# Altium PCB sequencer pvb v2.PcbDoc
Units mil, origin at the board's own origin, x right, y up, seen from the top; angles counter-clockwise.
Board outline 2440 x 3170 mil, 2 copper layers (Top Layer, Bottom Layer); 35 components, 24 nets, 114 pads, 2 vias.
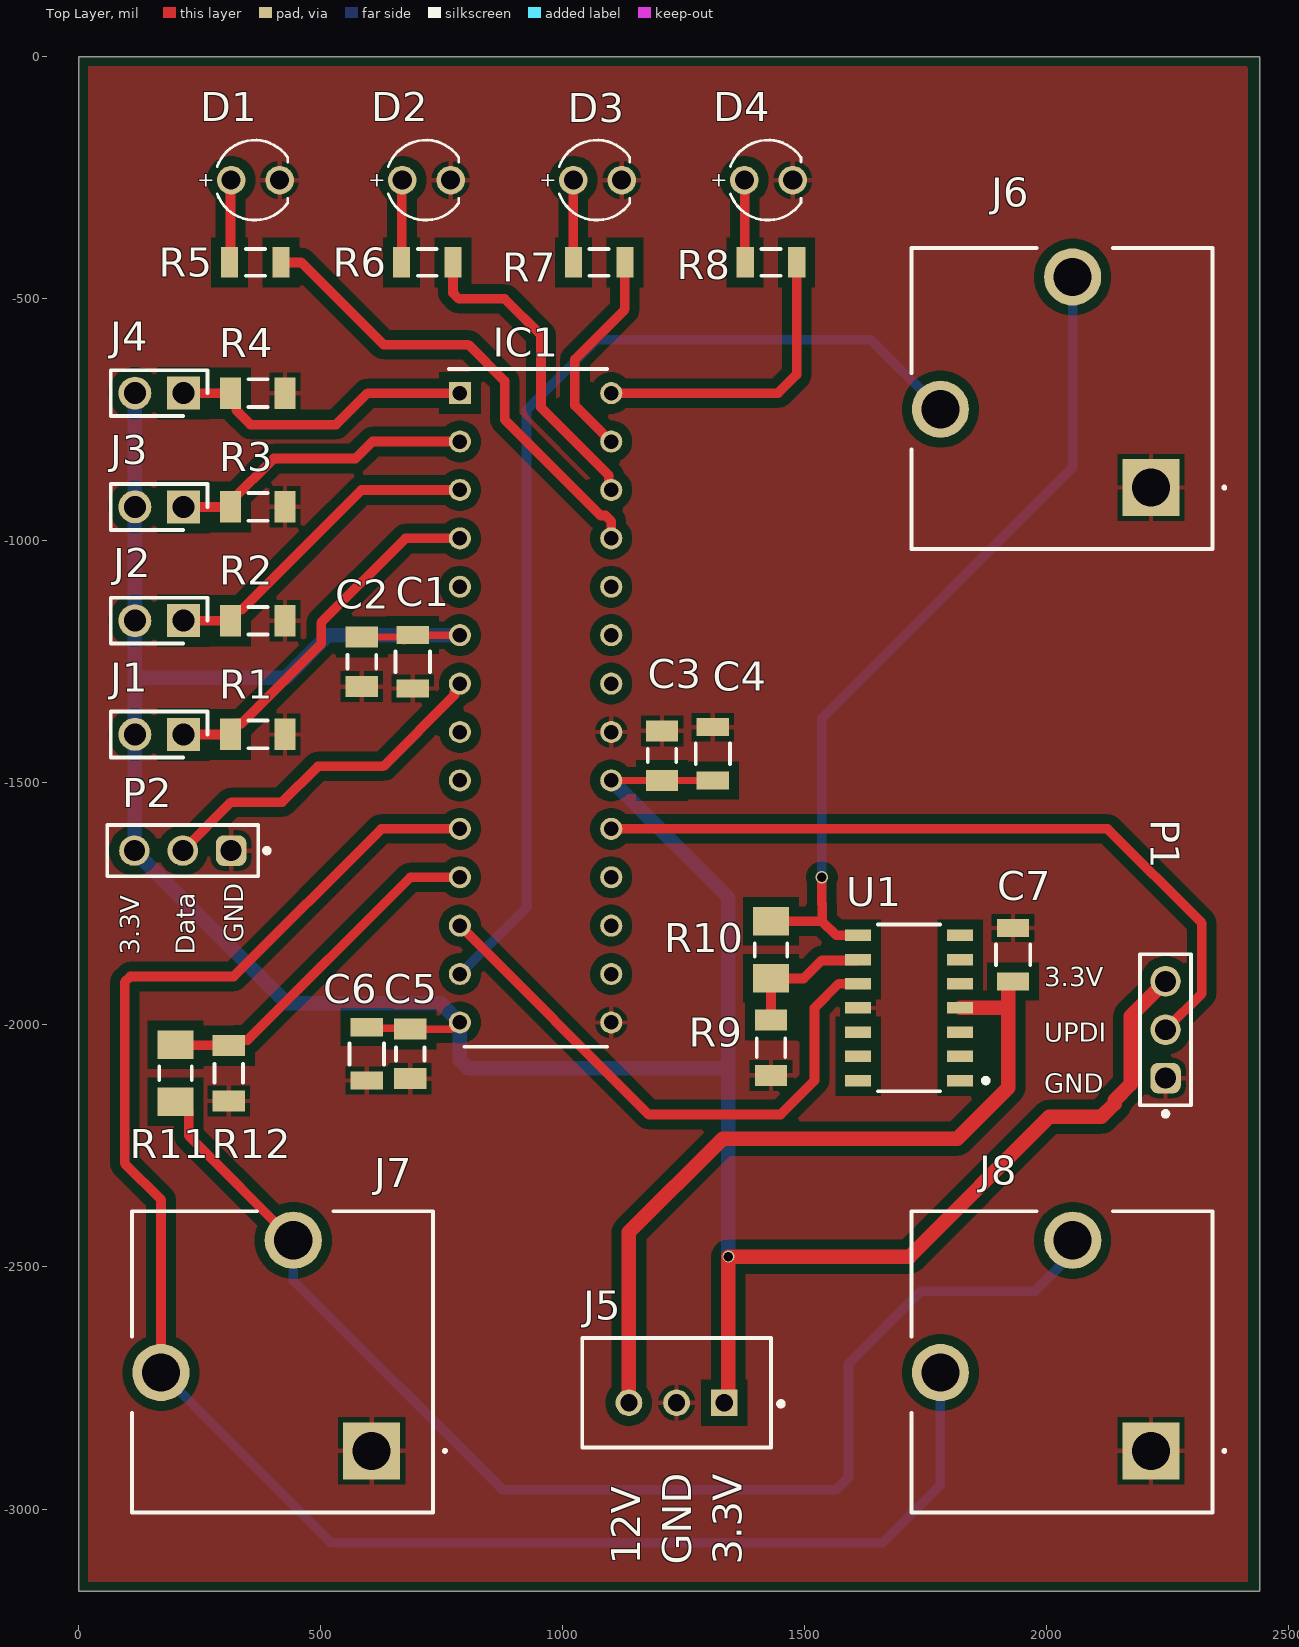
[diagram p0: Top Layer view]
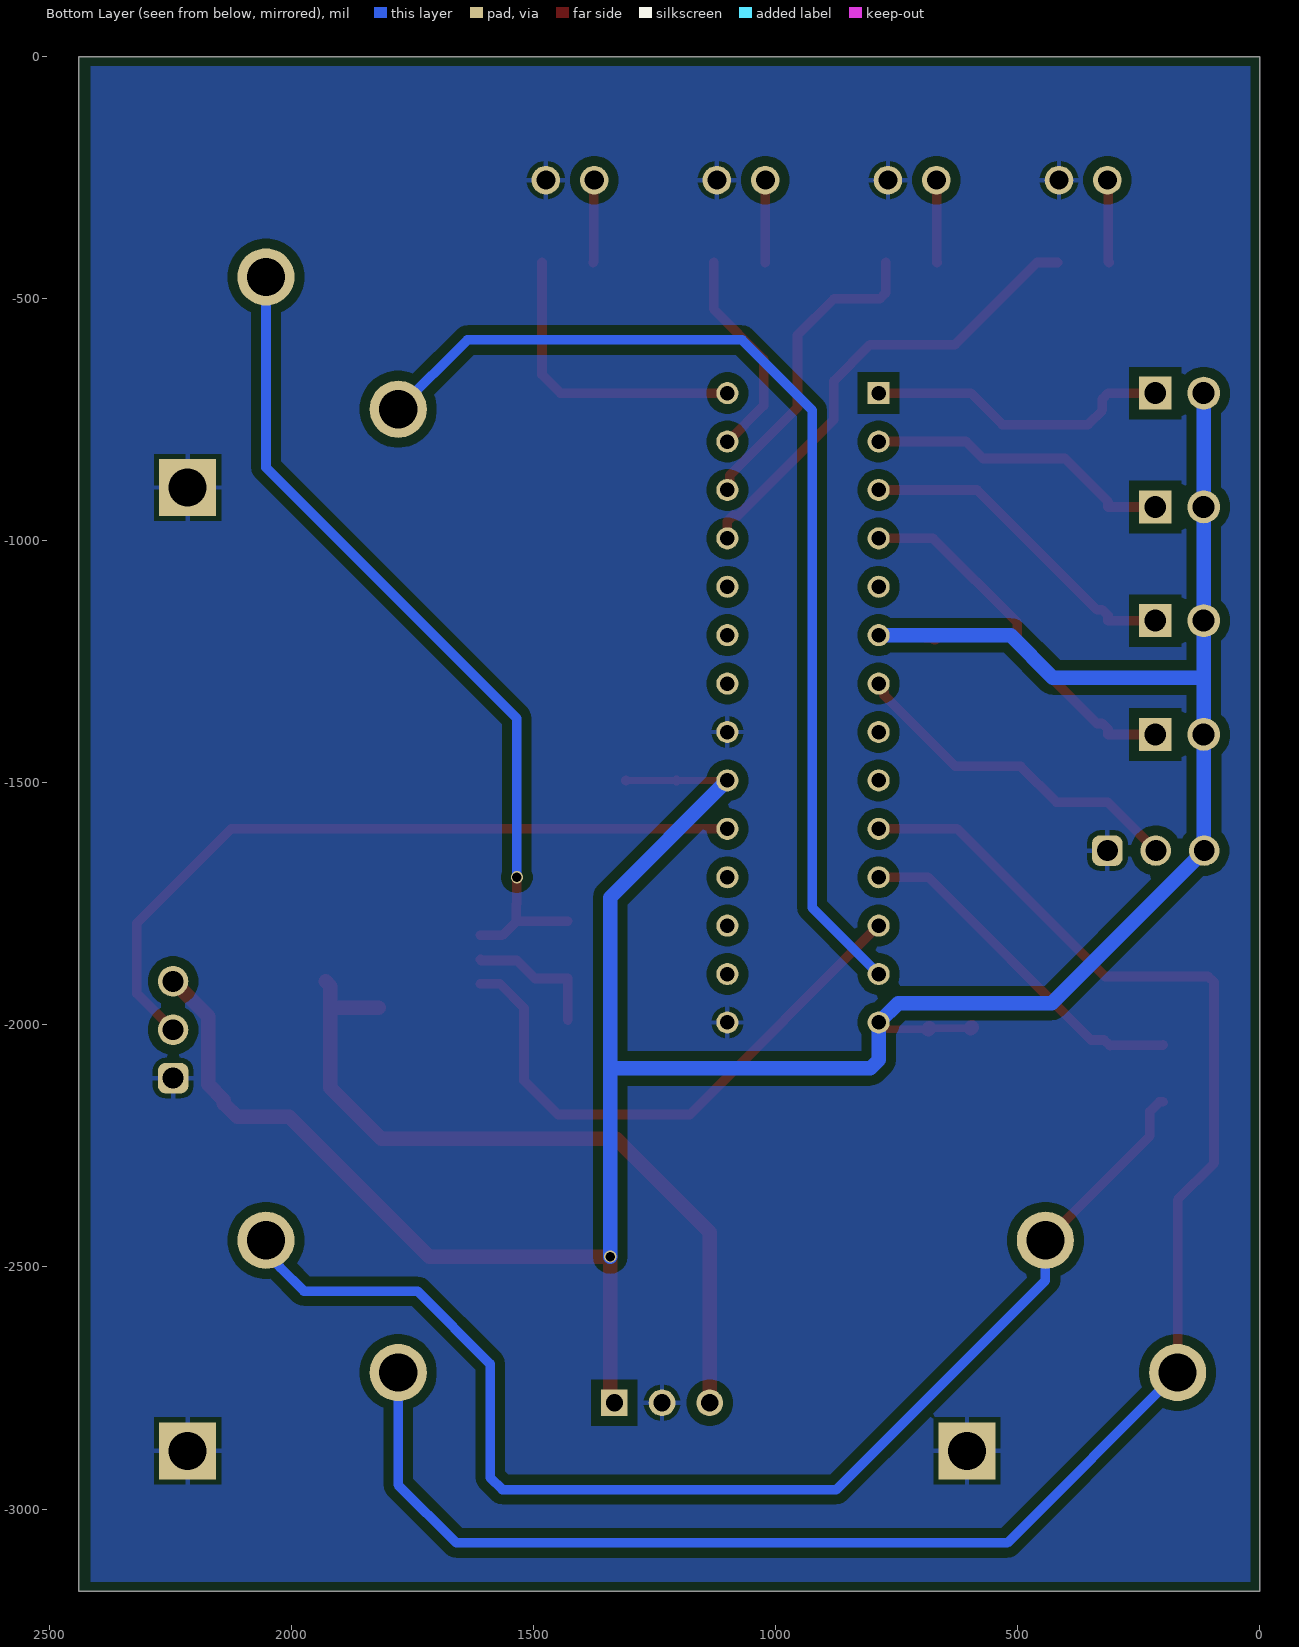
[diagram p1: Bottom Layer view, seen from below]

## Layer stack, top to bottom
Top Solder: solder mask 0.4, Solder Resist, Dk 3.5
Top Layer: signal copper 1.4
Dielectric 1: dielectric 12.6, FR-4, Dk 4.8
Bottom Layer: signal copper 1.4
Bottom Solder: solder mask 0.4, Solder Resist, Dk 3.5

## Board outline
0,-3170 0,0 2440,0 2440,-3170

## Design rules (kind name [scope] priority, off if disabled: settings)
Clearance [All] p1: gap=10 ignorepadtopadclearanceinfootprint=TRUE except(20: Arc-Fill Arc-Poly Arc-Region Track-Fill Track-Poly Track-Region SMDPad-Fill SMDPad-Poly SMDPad-Region THPad-Fill THPad-Poly THPad-Region Via-Fill Via-Poly Via-Region Fill-Fill Fill-Poly Fill-Region Poly-Poly Poly-Region Region-Region)
Height [All] p1: minheight=0 maxheight=99999 prefheight=500
HoleSize [All] p1: absolutevalues=TRUE maxlimit=220.47 minlimit=19.68 maxpercent=80.000 minpercent=20.000
HoleToHoleClearance [All] p1: gap=15 allowstackedmicrovias=TRUE
PolygonConnect [All] p1: connectstyle=Relief reliefconductorwidth=10 reliefentries=4 polygonreliefangle="90 Angle" airgapwidth=10
RoutingVias [All] p1: holewidth=15 width=18 viastyle="Through Hole" minholewidth=12 minwidth=12 maxholewidth=18 maxwidth=25
SilkToSilkClearance [All] p1: silktosilkclearance=15
SilkToSolderMaskClearance [IsPad] p1: minsilkscreentomaskgap=5 clearancetoexposedcopper=TRUE
SolderMaskExpansion [All] p1: expansion=4 istentingtop=FALSE
SupplyNets "Schematic Supply Nets_2" [InNet('+12')] p1: voltage=0.000
SupplyNets "Schematic Supply Nets_1" [InNet('+3.3')] p2: voltage=0.000
SupplyNets "Schematic Supply Nets" [InNet('GND')] p3: voltage=0.000
UnRoutedNet [All] p1: checkbadconnections=TRUE
Width [All] p1: maxlimit=100 minlimit=8 preferedwidth=20 minimp=50.000000 maximp=50.000000 favimp=50.000000
24 further rules are at their usual default settings.

## Components (designator, comment, footprint, x,y, rotation, side; value= is the part's Value field where it differs from the comment)
C1 "C1206C104K2RACTU" FP-C1206C-EB-MFG 690,-1250 r270 top value="0.10 μF"
C2 "C1206C105K5RACTU" CAPC3216X110X50LL20T25 585,-1250 r90 top
C3 "C1206C105K5RACTU" CAPC3216X110X50LL20T25 1205,-1443.82 r270 top
C4 "C1206C104K2RACTU" FP-C1206C-EB-MFG 1310,-1440 r90 top value="0.10 μF"
C5 "C1206C105K5RACTU" CAPC3216X110X50LL20T25 685,-2060 r90 top
C6 "C1206C104K2RACTU" FP-C1206C-EB-MFG 595,-2059.88 r270 top value="0.10 μF"
C7 "C1206C104K2RACTU" FP-C1206C-EB-MFG 1930,-1855 r270 top value="0.10 μF"
D1 "151031SS04000" WL-TMRC_D3.95H5.3 50365,49745 r0 top
D2 "151031SS04000" WL-TMRC_D3.95H5.3 50718.33,49745 r0 top
D3 "151031SS04000" WL-TMRC_D3.95H5.3 51071.67,49745 r0 top
D4 "151031SS04000" WL-TMRC_D3.95H5.3 51425,49745 r0 top
IC1 "AVR128DB28-I_SP" DIP794W56P254L3486H508Q28N 943.74,-1345 r0 top
J1 "78229-102HLF" HDRV2W67P0X254_1X2_508X241X1082P 216.1,-1400 r180 top
J2 "78229-102HLF" HDRV2W67P0X254_1X2_508X241X1082P 216.1,-1165 r180 top
J3 "78229-102HLF" HDRV2W67P0X254_1X2_508X241X1082P 216.1,-930 r180 top
J4 "78229-102HLF" HDRV2W67P0X254_1X2_508X241X1082P 216.1,-695 r180 top
J5 "B3B-XH-A(LF)(SN)" FP-B3B-XH-A_LF_SN-MFG 1235,-2760 r180 top
J6 "ACJS-NV35-3" ACJSNV353 2215,-890 r0 top
J7 "ACJS-NV35-3" ACJSNV353 605,-2880 r0 top
J8 "ACJS-NV35-3" ACJSNV353 2215.04,-2880 r0 top
P1 "61300311121" 61300311121 2245,-2010 r90 top
P2 "61300311121" 61300311121 215,-1640 r180 top
R1 "100" RESC3216X70X50NL05T20 370,-1400 r0 top
R2 "100" RESC3216X70X50NL05T20 370,-1165 r0 top
R3 "100" RESC3216X70X50NL05T20 370,-930 r0 top
R4 "100" RESC3216X70X50NL05T20 370,-695 r0 top
R5 "68" RESC3216X60X45LL10T20 365,-425 r0 top
R6 "68" RESC3216X60X45LL10T20 720,-425 r0 top
R7 "68" RESC3216X60X45LL10T20 1075,-425 r0 top
R8 "68" RESC3216X60X45LL10T20 1430,-425 r0 top
R9 "8.2k" RESC3216X60X45NL10T20 1430,-2047.09 r90 top
R10 "3.9k" RESC3216X70X50ML20T25 1430,-1845 r90 top
R11 "3.9k" RESC3216X70X50ML20T25 200,-2100 r90 top
R12 "8.2k" RESC3216X60X45NL10T20 310,-2100 r270 top
U1 "LM324DT" FP-SO-14-MFG 1715.32,-1965 r180 top

## Footprints (in the part's own frame and the unit in brackets; to place one, negate y for a bottom-side part, rotate by r counter-clockwise, add the part's x,y. Pads: shape width x height; smd on the part's side, far side on the other; paste and mask are expansions set on the pad)
61300311121 [mm] "Pin Header, pitch 2.54 mm, THT, Vertical, single row, 3p"
  rrect50% 1.6x1.6 hole 1.1: 1(-2.54,0)
  round 1.6 hole 1.1: 2(0,0) 3(2.54,0)
  silkscreen extent -4.53,-1.35 3.96,1.35, body extent -3.81,-1.27 3.81,1.27, height 8.57
ACJSNV353 [mm]
  rect 3x3 hole 2: 1(0,0)
  round 3 hole 2: 3(-11.05,4.11) 4(-4.11,11.05)
  silkscreen extent -12.57,-3.23 3.9,12.57, body extent -12.57,-3.23 3.23,12.57, height 27.1
CAPC3216X110X50LL20T25 [mm] "Chip Capacitor, 2-Leads, Body 3.20x1.60mm, IPC High Density"
  rect 1.1x1.7 smd: 1(-1.3,0) 2(1.3,0)
  silkscreen extent -0.35,-0.75 0.35,0.75, body extent -1.7,-0.9 1.7,0.9, height 1.1
DIP794W56P254L3486H508Q28N [mil]
  rect 45.63x45.63 hole 29.88: 1(-156.26,650)
  round 45.63 hole 29.88: 2(-156.26,550) 3(-156.26,450) 4(-156.26,350) 5(-156.26,250) 6(-156.26,150) 7(-156.26,50) 8(-156.26,-50) 9(-156.26,-150) 10(-156.26,-250) 11(-156.26,-350) 12(-156.26,-450) 13(-156.26,-550) 14(-156.26,-650) 15(156.26,-650) 16(156.26,-550) 17(156.26,-450) 18(156.26,-350) 19(156.26,-250) 20(156.26,-150) 21(156.26,-50) 22(156.26,50) 23(156.26,150) 24(156.26,250) 25(156.26,350) 26(156.26,450) 27(156.26,550) 28(156.26,650)
  silkscreen extent -179,-700 147,700, body extent -162,-686 162,686, height 200
FP-B3B-XH-A_LF_SN-MFG [mm]
  rect 1.4x1.4 hole 0.9 paste-2539.97 mask+0: 1(-2.5,0.525)
  round 1.4 hole 0.9 paste-2539.97 mask+0: 2(0,0.525) 3(2.5,0.525)
  silkscreen extent -5.6,-2.88 4.95,2.88, body extent -5.05,-2.98 5.05,2.98, height 0.25
FP-C1206C-EB-MFG [mm]
  rect 0.95x1.7 smd paste+0 mask+0: 1(-1.4,0) 2(1.4,0)
  silkscreen extent -0.55,-0.9 0.55,0.9, body extent -2,-1 2,1, height 0.25
FP-SO-14-MFG [mm]
  rect 1.35x0.6 smd paste+0 mask+0: 1(-2.675,3.81) 2(-2.675,2.54) 3(-2.675,1.27) 4(-2.675,0) 5(-2.675,-1.27) 6(-2.675,-2.54) 7(-2.675,-3.81) 8(2.675,-3.81) 9(2.675,-2.54) 10(2.675,-1.27) 11(2.675,0) 12(2.675,1.27) 13(2.675,2.54) 14(2.675,3.81)
  silkscreen extent -4.15,-4.38 1.63,4.38, body extent -3.45,-4.47 3.45,4.47, height 0.25
HDRV2W67P0X254_1X2_508X241X1082P [mm]
  rect 1.725x1.725 hole 1.15: 1(0,0)
  round 1.725 hole 1.15: 2(2.54,0)
  silkscreen extent -1.27,-1.2 3.81,1.2, body extent -1.27,-1.2 3.81,1.2, height 10.82
RESC3216X60X45LL10T20 [mm] "Chip Resistor, 2-Leads, Body 3.20x1.60mm, IPC High Density"
  rect 0.9x1.6 smd: 1(-1.35,0) 2(1.35,0)
  silkscreen extent -0.5,-0.7 0.5,0.7, body extent -1.65,-0.85 1.65,0.85, height 0.6
RESC3216X60X45NL10T20 [mm] "Chip Resistor, 2-Leads, Body 3.20x1.60mm, IPC Medium Density"
  rect 1.1x1.7 smd: 1(-1.45,0) 2(1.45,0)
  silkscreen extent -0.5,-0.75 0.5,0.75, body extent -1.65,-0.85 1.65,0.85, height 0.6
RESC3216X70X50ML20T25 [mm] "Chip Resistor, 2-Leads, Body 3.20x1.60mm, IPC Low Density"
  rect 1.5x1.9 smd: 1(-1.5,0) 2(1.5,0)
  silkscreen extent -0.35,-0.85 0.35,0.85, body extent -1.7,-0.9 1.7,0.9, height 0.7
RESC3216X70X50NL05T20 [mm] "Chip Resistor, 2-Leads, Body 3.20x1.60mm, IPC Medium Density"
  rect 1.1x1.65 smd: 1(-1.425,0) 2(1.425,0)
  silkscreen extent -0.5,-0.72 0.5,0.72, body extent -1.63,-0.82 1.62,0.82, height 0.7
WL-TMRC_D3.95H5.3 [mm] "THT Mono-color Round Color LED, 2-leads"
  round 1.5 hole 1: 1(-1271.27,-1270) 2(-1268.73,-1270)
  silkscreen extent -1272,-1272.1 -1268.31,-1267.9, body extent -1271.99,-1271.97 -1268.37,-1268.03, height 5.35

## Part data
C1 C4 C6 C7: library part CMP-1037-04222-2, "CAP CER 0.1UF 200V 10% X7R 1206", Capacitance="0.10 μF", Manufacturer=KEMET, Package=C1206C-EB, Temperature="-55°C to +150°C", Temperature Characteristic=X7R, Temperature Coefficient=15%, Temperature Range High=+150°C, Temperature Range Low=-55°C, Tolerance=0.1, Voltage Rating="200 V", Automotive=Yes, Automotive Grade="Grade 0", Category=Cap, ComponentLink2Description=Datasheet, ComponentLink2URL=https://content.kemet.com/datasheets/KEM_C1007_X8R_ULTRA_150C_SMD.pdf, Device Class L1="Passive Components", Device Class L2=Capacitors, Device Class L3="Ceramic Capacitors", Digikey Description="CAP CER 0.1UF 200V 10% X7R 1206", Height=0.88mm, Ipc Land Pattern Name=CAPC320160X78, Lead Free=Yes, Manufacturer Part Number=C1206C104K2RACTU, Material=Ceramic, Mouser Description="Multilayer Ceramic Capacitors MLCC - SMD/SMT 200volts 0.1uF X7R 10%", Octopart=https://octopart.com/c1206c104k2ractu-kemet-9138344, RoHS=TRUE
C2 C3 C5: library part CMP-2000-06011-1, "Chip Capacitor, 1 uF, +/- 10%, 50 V, -55 to 125 degC, 1206 (3216 Metric), RoHS, Tape and Reel", Capacitance=1uF, Capacitance - nF=1000nF, Case Code - in=1206, Case Code - mm=3216, Case Height=1mm, Case Length=3.2mm, Case Width=1.6mm, Dielectric=X7R, Manufacturer=Kemet, Maximum Operating Temperature=+125C, Minimum Operating Temperature=-55C, Operating Temperature Range=-55Cto+125C, Package / Case=1206(3216metric), Package Description="2-Pin Surface Mount Device, Body 3.2 x 1.6 mm", Temperature Coefficient / Code=+/-15%, Tolerance=10%, Voltage Rating=50V, Brand=Kemet, Class=Class1, Datasheet URL=http://www.kemet.com/docfinder?Partnumber=C1206C105K5RACTU, Datasheet Version=02/2016, Dimensions=1.6mmWx3.2mmLx1mmH, Factory Pack Quantity=2500, Manufacturer URL=http://www.kemet.com/, Mounting Technology=SurfaceMount, Package Reference=1206, Packaging=Reel, Product=GeneralTypeMLCCs, Product Category=MultilayerCeramicCapacitorsMLCC-SMD/SMT, RoHS=Details, Series=C1206C, Termination Style=SMD/SMT, Type=SMDMLCCX7R6.3-250VDCCommericalGrade, Voltage Rating DC=50V
D1 D2 D3 D4: library part CMP-1488-00005-2, Case/Package=Radial, Color=Red, Forward Current=100mA, Forward Voltage=2V, Max Operating Temperature=85°C, Max Reverse Voltage (DC)=5V, Min Operating Temperature=-40°C, Test Current=20mA, Dominant Wavelength=635nm, Height=5.3mm, Length=3mm, Lens Size=3mm, Lens Style="Circular, Diffused, Round", Luminous Intensity=160mcd, Mount="Through Hole", NexarPartId=29717802, Packaging=Bulk, Peak Wavelength=640nm, REACH SVHC=Unknown, RoHS=Compliant, Viewing Angle=40°, Wavelength=635nm, Width=3mm
IC1: "Integrated Circuit", Arrow Part Number=AVR128DB28-I/SP, Manufacturer_Name=Microchip, Mouser Part Number=579-AVR128DB28-I/SP, Arrow Price/Stock=https://www.arrow.com/en/products/avr128db28-isp/microchip-technology?region=nac, Datasheet Link=https://ww1.microchip.com/downloads/en/DeviceDoc/AVR128DB28-32-48-64-DataSheet-DS40002247A.pdf, Height=5.08mm, Manufacturer_Part_Number=AVR128DB28-I/SP, Mouser Price/Stock=https://www.mouser.co.uk/ProductDetail/Microchip-Technology/AVR128DB28-I-SP?qs=vmHwEFxEFR9SktvWL9jpqg%3D%3D
J1 J2 J3 J4: "Connector", Manufacturer_Name=Amphenol, Arrow Part Number=78229-102HLF, Arrow Price/Stock=https://www.arrow.com/en/products/78229-102hlf/amphenol-fci?region=europe, Datasheet Link=https://cdn.amphenol-icc.com/media/wysiwyg/files/drawing/69190.pdf, Height=10.82mm, Manufacturer_Part_Number=78229-102HLF
J5: library part CMP-17439-000014-3, "CONN HEADER VERT 3POS 2.5MM", Color=Natural, Contact Resistance=20mR, Current Rating=3A, Flammability Rating="UL94 V-0", Housing Color=White, Insulation Resistance=1GR, Max Operating Temperature=85°C, Max Voltage Rating (AC)=250V, Min Operating Temperature=-25°C, Connector Type=Header, Contact Finish - Mating=TIN, Contact Material=Brass, Contact Plating=Tin, Contact Shape=Square, Contact Type="Male Pin", Depth=5.75mm, Fastening Type=Detent, Gender=Male, Housing Material=Polyamide, Insulation Color=Natural, Insulation Material=Nylon, Lead Free="Lead Free", Lead Pitch=2.5mm, Length=9.9mm, Max Current Rating=3A, Max Voltage Rating (DC)=250V, Mount="Through Hole", Number of Contacts=3, Number of Positions=3, Number of Rows=1, Orientation=Straight, Packaging=Bulk, Pitch=2.5mm, REACH SVHC="No SVHC", Series=XH, Termination=Solder, Voltage Rating=250V, Voltage Rating (AC)=250V, Wire/Cable Gauge=22AWG
J6 J7 J8: "Connector", Manufacturer_Name=Amphenol, Mouser Part Number=523-ACJS-NV35-3, Arrow Part Number=ACJS-NV35-3, Arrow Price/Stock=https://www.arrow.com/en/products/acjs-nv35-3/amphenol-sine-systems, Datasheet Link=https://www.amphenolaudio.com/wp-content/uploads/2015/07/55010544000110_acjx-nv35-x.pdf, Height=27mm, Manufacturer_Part_Number=ACJS-NV35-3, Mouser Price/Stock=https://www.mouser.co.uk/ProductDetail/Amphenol-Audio/ACJS-NV35-3?qs=t8VhaDIDl4uNwZ56Tr4iPg%3D%3D
P1 P2: library part CMP-1502-01062-3, "Potmeter connectie", Color=Black, Contact Resistance=20mΩ, Current Rating=3A, Max Operating Temperature=105°C, Min Operating Temperature=-40°C, Operating Supply Voltage=250V, Connector Type="Male Pin", Contact Material=Copper, Contact Mating Length=5.9944mm, Contact Plating=Gold, Gender=Male, Height=8.94mm, Lead Free="Lead Free", Lead Pitch=2.54mm, Mount="Through Hole", NexarPartId=32855521, Number of Contacts=3, Number of Pins=3, Number of Positions=3, Number of Rows=1, Orientation=Vertical, Packaging=Bulk, Pitch=2.54mm, REACH SVHC=Unknown, RoHS=Compliant, Termination=Solder, Voltage Rating=250V
R1 R2 R3 R4: library part CMP-2003-00016-1, Manufacturer=Panasonic, Part Number=ERJ-8ENF1000V
R5 R6 R7 R8: library part CMP-1014-00378-2, Manufacturer="Vishay Dale", Part Number=CRCW120668R0FKEA
R9 R12: library part CMP-2003-02160-1, Manufacturer="Vishay Dale", Part Number=CRCW12063K90FKEA
R10 R11: library part CMP-2003-04435-1, Manufacturer=Panasonic, Part Number=ERA8AEB202V
U1: library part CMP-12131-000005-1, "IC OPAMP GP 4 CIRCUIT 14SO", Input Bias Current=0.02uA, Input Offset Voltage=2mV, Manufacturer=STMicroelectronics, Max Dual Supply Voltage=15V, Max Junction Temp=+150°C, Max Supply Voltage=30V, Min Dual Supply Voltage=1.5V, Min Supply Voltage=3V, Nominal Supply Current=0.7-1.5mA, Output Current Per Channel=20-50mA, Package=SO-14, Temperature="0°C to +70°C", Temperature Range High=+70°C, Temperature Range Low=0°C, Voltage Gain=100dB, Automotive=No, Bandwidth=1.3MHz, Category=IC, ComponentLink2Description=Datasheet, ComponentLink2URL=https://www.st.com/content/ccc/resource/technical/document/datasheet/bd/fc/46/43/26/8f/40/7f/CD00001046.pdf/files/CD00001046.pdf/jcr:content/translations/en.CD00001046.pdf, Device Class L1="Integrated Circuits (ICs)", Device Class L2="Linear ICs", Device Class L3="Amplifiers - Op Amps", Digikey Description="IC OPAMP GP 4 CIRCUIT 14SO", Footprint Url=https://www.st.com/content/ccc/resource/technical/document/datasheet/group3/10/8a/e6/12/f8/e8/49/ce/DM00366438/files/DM00366438.pdf/jcr:content/translations/en.DM00366438.pdf, Gain Bandwidth=1.3MHz, Height=1.75mm, Lead Free=Yes, Manufacturer Part Number=LM324DT, Mouser Description="LM324 Series 32 V 1.3 MHz Low Power Quad Operational Amplifier - SOIC-14", Number Of Channels=4, Octopart=https://octopart.com/lm324dt-stmicroelectronics-39579146, RoHS=TRUE, Standoff Height=0.1mm

## Via types
v1: diameter 25, hole 20, Top Layer to Bottom Layer, 2 vias

## Nets (pads, with @x,y where several pads share a name; then routed paths per layer and width w, separated by ;. In a path a pad name is that pad's centre, name@x,y a point inside that pad or via, vN(x,y) a via of type N, cw(c..) or ccw(c..) an arc to the next point about the centre after c; other vN are vias at no path point)
+3.3: C1.1 C2.2 C3.2 C4.1 C5.2 C6.1 IC1.6 IC1.14 IC1.20 J1.2 J2.2 J3.2 J4.2 J5.1 P1.3 P2.3 | length 6340.2
  Top Layer w15: C2.2 C1.1@671.3,-1198.82 ; C6.1@597.03,-2006.79 C5.2@682.97,-2006.79 ; C5.2 769.43,-2008.82 IC1.14@783.25,-1995 ; C1.1@690.06,-1194.94 IC1.6@787.42,-1194.94 ; IC1.20 C3.2 ; C3.2@1205.06,-1495.06 C4.1@1309.94,-1495.06
  Top Layer w20: C3.2 C3.2@1205.06,-1495.06 ; C4.1@1309.94,-1495.06 C4.1
  Top Layer w30: C6.1 C6.1@597.03,-2006.79 ; C1.1@671.3,-1198.82 675.24,-1194.88 C1.1 C1.1@690.06,-1194.94 ; C5.2@682.97,-2006.79 C5.2 ; IC1.14@783.25,-1995 IC1.14 ; IC1.6@787.42,-1194.94 IC1.6 ; J5.1 1341.9,-2772.2 v1(1341.9,-2478.79) 1716.21,-2478.79 2005,-2190 2112.38,-2190 2139.95,-2162.43 2139.95,-2155.36 2172.75,-2122.56 2172.75,-1982.25 P1.3
  Bottom Layer w30: J4.2 J3.2 J2.2 116.1,-1282.5 ; IC1.6 515,-1195 427.5,-1282.5 116.1,-1282.5 ; IC1.20 1341.9,-1736.9 1341.9,-2090 ; v1(1341.9,-2478.79) 1341.9,-2090 ; 116.1,-1282.5 J1.2 115.55,-1400.55 115.55,-1639.45 P2.3 430,-1955 747.48,-1955 IC1.14 787.48,-2072.43 805.05,-2090 1341.9,-2090
+12: C7.2 J5.3 U1.4 | length 1582.7
  Top Layer w30: J5.3 1136.57,-2428.43 1330,-2235 1815,-2235 1920,-2130 1920,-1965 ; U1.4 1920,-1965 ; C7.2 1920,-1920.12 1920,-1965
GND: C1.2 C2.1 C3.1 C4.2 C5.1 C6.2 C7.1 D1.2 D2.2 D3.2 D4.2 IC1.15 IC1.21 J5.2 J6.1 J7.1 J8.1 P1.1 P2.1 R1.2 R2.2 R3.2 R4.2 R9.1 R12.2 U1.11
NetD1_1: D1.1 R5.1 | length 171.3
  Top Layer w20: R5.1 313.43,-423.43 313.43,-256.57 D1.1
NetD2_1: D2.1 R6.1 | length 170.6
  Top Layer w20: R6.1 667.59,-424.26 667.59,-255.74 D2.1
NetD3_1: D3.1 R7.1 | length 170.1
  Top Layer w20: D3.1 1021.76,-255.09 1021.76,-424.91 R7.1
NetD4_1: D4.1 R8.1 | length 170.8
  Top Layer w20: D4.1 1375.93,-255.93 1375.93,-424.07 R8.1
NetIC1_1: IC1.1 J4.1 R4.1 | length 639.2
  Top Layer w20: J4.1 R4.1 325.55,-706.65 325.55,-730.55 355,-760 531.76,-760 596.76,-695 IC1.1
NetIC1_2: IC1.2 J3.1 R3.1 | length 633.6
  Top Layer w20: J3.1 R3.1 313.9,-919.17 403.07,-830 571.86,-830 606.86,-795 IC1.2
NetIC1_3: IC1.3 J2.1 R2.1 | length 689.6
  Top Layer w20: J2.1 R2.1 313.9,-1154.17 325.55,-1142.52 336.38,-1142.52 583.9,-895 IC1.3
NetIC1_4: IC1.4 J1.1 R1.1 | length 771.2
  Top Layer w20: J1.1 R1.1 313.9,-1389.17 325.55,-1377.52 336.38,-1377.52 500.94,-1212.95 500.94,-1169.06 675,-995 IC1.4
NetIC1_7: IC1.7 P2.2 | length 722.7
  Top Layer w20: P2.2 315,-1540 420,-1540 494.16,-1465.84 629.16,-1465.84 776.39,-1318.61 776.39,-1313.02 787.48,-1301.94 IC1.7
NetIC1_10: IC1.10 J7.3 J8.3 | length 3698.5
  Top Layer w20: J7.3 169.96,-2361.07 95,-2286.11 95,-1911.72 106.72,-1900 320,-1900 625,-1595 IC1.10
  Bottom Layer w20: J7.3 521.77,-3070 1660,-3070 1780,-2950 J8.3
NetIC1_11: IC1.11 R11.2 R12.1 | length 732.4
  Top Layer w20: R11.2 200.98,-2041.93 309.02,-2041.93 R12.1 321.65,-2031.26 348.74,-2031.26 685,-1695 IC1.11
NetIC1_12: IC1.12 U1.10 | length 1183.8
  Top Layer w20: IC1.12 1177.48,-2185 1450,-2185 1520,-2115 1520,-1965 1570,-1915 U1.10
NetIC1_13: IC1.13 J6.3 | length 2196.3
  Bottom Layer w20: IC1.13 925,-1757.48 925,-730 1070,-585 1636.77,-585 J6.3
NetIC1_19: IC1.19 P1.2 | length 1551.8
  Top Layer w20: IC1.19 2125,-1595 2320,-1790 2320,-1935 P1.2
NetIC1_25: IC1.25 R5.2 | length 985.4
  Top Layer w20: R5.2 460,-425 630,-595 805,-595 880,-670 880,-749.69 1078.12,-947.82 1088.28,-947.82 1100,-959.53 IC1.25
NetIC1_26: IC1.26 R6.2 | length 661.1
  Top Layer w20: R6.2 773.15,-488.28 784.87,-500 880,-500 955,-575 955,-724.69 1095.15,-864.85 1095.15,-890.15 IC1.26
NetIC1_27: IC1.27 R7.2 | length 443.4
  Top Layer w20: IC1.27@1099.15,-795 1025,-720.85 1025,-625 1128.15,-521.85 R7.2
NetIC1_28: IC1.28 R8.2 | length 630.8
  Top Layer w20: IC1.28 1445,-695 1483.15,-656.85 R8.2
NetJ6_4: J6.4 R10.2 U1.8 | length 1738
  Top Layer w20: R10.2 1535.87,-1785.94 ; v1(1535,-1695) 1535,-1750 1535.87,-1750.87 1535.87,-1785.94 ; U1.8 1564.92,-1815 1535.87,-1785.94
  Bottom Layer w20: v1(1535,-1695) 1535,-1366.67 2053.19,-848.48 J6.4
NetJ7_4: J7.4 J8.4 R11.1 | length 2630.1
  Top Layer w20: R11.1 207.87,-2159.06 227.4,-2178.58 227.4,-2229.17 J7.4
  Bottom Layer w20: J7.4 443.19,-2528.19 875,-2960 1565,-2960 1590,-2935 1590,-2700 1740,-2550 1975,-2550 2023.66,-2501.34 2023.66,-2501.07 2053.23,-2471.51 J8.4
NetR9_2: R9.2 R10.1 U1.9 | length 282.1
  Top Layer w20: R9.2 R10.1 1497.4,-1904.06 1534.65,-1866.81 1608.19,-1866.81 U1.9
pads on no net: IC1.5 IC1.8 IC1.9 IC1.16 IC1.17 IC1.18 IC1.22 IC1.23 IC1.24 U1.1 U1.2 U1.3 U1.5 U1.6 U1.7 U1.12 U1.13 U1.14

## Polygon pours and split planes (outlines as drawn)
GND on Bottom Layer "NONET_L02_P-001" (solid, pour order 2): 20,-20 2415,-20 2415,-3150 20,-3150
GND on Top Layer "GND_L01_P001" (solid, pour order 1): 20,-20 2420,-20 2415,-25 2415,-3150 20,-3150

## Silkscreen, mask and mechanical layers (free items; w line width, h text height)
Top Overlay:
  text "GND" at 340,-1830 h39.37 r90
  text "3.3V" at 125,-1855 h39.37 r90
  text "Data" at 240,-1855 h39.37 r90
  text "3.3V" at 1995,-1920 h39.37
  text "UPDI" at 1995,-2035 h39.37
  text "GND" at 1995,-2140 h39.37
  text "12V" at 1160,-3115 h60 r90
  text "GND" at 1265,-3115 h60 r90
  text "3.3V" at 1370,-3115 h60 r90

## Text inside footprints (layer, text, board x,y; h text height)
D1: Top Overlay "+" at 244.92,-268.78 h31.5
D2: Top Overlay "+" at 598.25,-268.78 h31.5
D3: Top Overlay "+" at 951.59,-268.78 h31.5
D4: Top Overlay "+" at 1304.92,-268.78 h31.5